# Altium PCB FEU-102-1_part2.PcbDoc
Units mm, origin at the board's own origin, x right, y up, seen from the top; angles counter-clockwise.
Board outline 20 x 20 mm, 2 copper layers (Top Layer, Bottom Layer), stack 1.021 mm thick; 28 components, 24 nets, 67 pads, 3 vias.
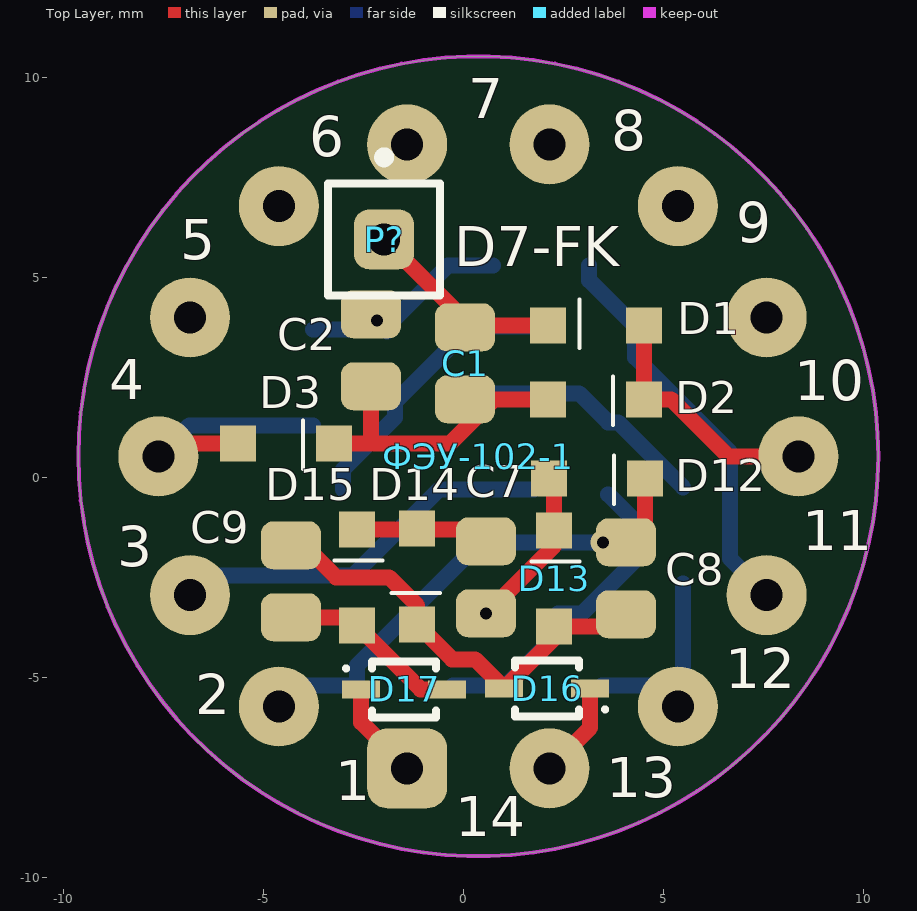
[diagram p0: Top Layer view]
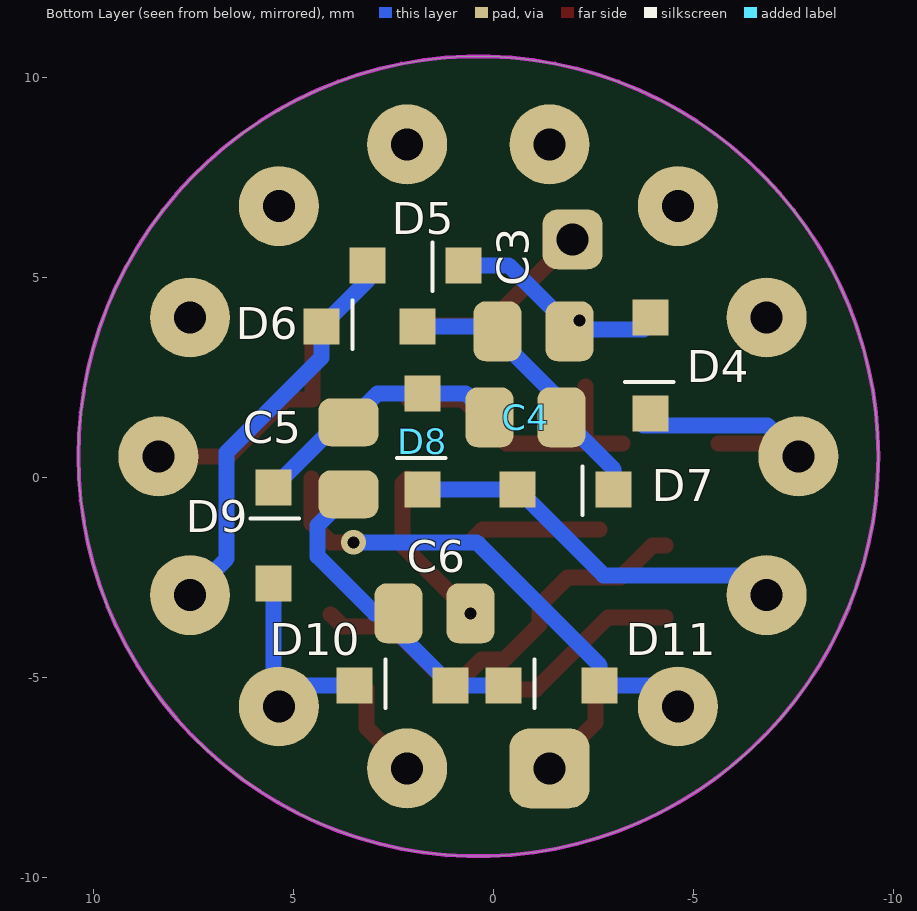
[diagram p1: Bottom Layer view, seen from below]

## Layer stack, top to bottom
Top Solder: solder mask 0.0102, Solder Resist, Dk 3.5
Top Layer: signal copper 0.0356
Dielectric1: dielectric 0.95, FR-4, Dk 4.8
Bottom Layer: signal copper 0.0356
Bottom Solder: solder mask 0.0102, Solder Resist, Dk 3.5

## Board outline
-9.62,0.526 ccw(c0.38,0.526) 0.38,-9.474 ccw(c0.38,0.526) 10.38,0.526 ccw(c0.38,0.526) 0.38,10.526 ccw(c0.38,0.526)

## Design rules (kind name [scope] priority, off if disabled: settings)
Clearance [All] p1: gap=0.25
ComponentClearance [All] p1: gap=0.1 collisioncheckmode=3 verticalgap=0.254 showdistances=TRUE
HoleSize [All] p1: absolutevalues=TRUE maxlimit=2.54 minlimit=0.3 maxpercent=80.000 minpercent=20.000
HoleToHoleClearance [All] p1: gap=0.152 allowstackedmicrovias=TRUE
MinimumAnnularRing [All] p1: minimumring=0.2
MinimumSolderMaskSliver [All] p1: minsoldermaskwidth=0.152
PlaneClearance [All] p1: clearance=2
PlaneConnect [All] p1: planeconnectstyle=Relief reliefexpansion=0.457 reliefentries=4 reliefconductorwidth=0.3 reliefairgap=0.457
PolygonConnect PolygonConnect_via [IsVia] p1: connectstyle=Direct reliefconductorwidth=0.254 reliefentries=4 polygonreliefangle="90 Angle" airgapwidth=0.254
PolygonConnect [All] p2: connectstyle=Relief reliefconductorwidth=0.254 reliefentries=4 polygonreliefangle="90 Angle" airgapwidth=0.254
RoutingVias [All] p1: holewidth=0.3 width=0.62 viastyle="Through Hole" minholewidth=0.3 minwidth=0.62 maxholewidth=6 maxwidth=4
SilkToSilkClearance [All] p1: silktosilkclearance=0.152
SilkToSolderMaskClearance SilkscreenOverComponentPads [IsPad] p1: minsilkscreentomaskgap=0.1 clearancetoexposedcopper=TRUE
SolderMaskExpansion [All] p1: expansion=0.1
Width [All] p1: maxlimit=2.254 minlimit=0.4 preferedwidth=0.4
22 further rules are at their usual default settings.

## Components (designator, comment, footprint, x,y, rotation, side; value= is the part's Value field where it differs from the comment)
C1 "47nF" 0805_CAP 0.05,2.85 r90 top
C2 "47nF" 0805_CAP -2.3,3.175 r270 top
C3 "47nF" 0805_CAP -1,3.65 r180 bottom
C4 "47nF" 0805_CAP -0.8,1.5 r180 bottom
C5 "47nF" 0805_CAP 3.625,0.475 r90 bottom
C6 "47nF" 0805_CAP 1.475,-3.4 r0 bottom
C7 "47nF" 0805_CAP 0.575,-2.5 r270 top
C8 "47nF" 0805_CAP 4.075,-2.525 r90 top
C9 "47nF" 0805_CAP -4.3,-2.6 r90 top
D1 "" DA2JF8100L 4.525,3.8 r180 top
D2 "" DA2JF8100L 2.125,1.95 r0 top
D3 "" DA2JF8100L -5.625,0.85 r0 top
D4 "" DA2JF8100L -3.925,4 r270 bottom
D5 "" DA2JF8100L 3.15,5.3 r180 bottom
D6 "" DA2JF8100L 1.9,3.775 r0 bottom
D7 "" DA2JF8100L -0.6,-0.3 r180 bottom
D8 "" DA2JF8100L 1.775,2.1 r270 bottom
D9 "" DA2JF8100L 5.5,-2.65 r90 bottom
D10 "" DA2JF8100L 1.075,-5.2 r0 bottom
D11 "" DA2JF8100L -2.65,-5.2 r0 bottom
D12 "" DA2JF8100L 2.15,-0.025 r0 top
D13 "" DA2JF8100L 2.275,-3.725 r90 top
D14 "" DA2JF8100L -1.15,-1.275 r270 top
D15 "" DA2JF8100L -2.65,-3.7 r90 top
D16 "D Zener" BZX384 2.1,-5.275 r180 top
D17 "D Zener" BZX384 -1.475,-5.3 r0 top
P? "Plug" PIN1 -1.975,5.95 r0 top
ФЭУ-102-1 "Header 7X2" ФЭУ-102 0.38,0.526 r0 top locked

## Footprints (in the part's own frame and the unit in brackets; to place one, negate y for a bottom-side part, rotate by r counter-clockwise, add the part's x,y. Pads: shape width x height; smd on the part's side, far side on the other; paste and mask are expansions set on the pad)
0805_CAP [mm]
  rrect50% 1.2x1.5 smd: 1(-0.9,0) 2(0.9,0)
  body extent -1.11,-0.72 1.1,0.72, height 0.94
BZX384 [mm] "SOD323"
  rect 0.95x0.45 smd: 1(1.075,0) 2(-1.075,0)
  silkscreen extent -1.5,-0.7 0.8,0.7, body extent -1.25,-0.67 1.25,0.67, height 1.1
DA2JF8100L [mm]
  rect 0.9x0.9 smd: 1(0,0) 2(2.4,0)
  silkscreen extent 1.62,-0.64 1.62,0.57, body extent 0.36,-0.65 2.06,0.6, height 0.7
PIN1 [mm] "Connector; Plug"
  rrect50% 1.5x1.5 hole 0.8: 1(0,0)
  silkscreen extent -1.4,-1.4 1.4,2.17
ФЭУ-102 [mm]
  rrect50% 2x2 hole 0.8: 1(-1.78,-7.799)
  round 2 hole 0.8: 2(-4.988,-6.255) 3(-7.208,-3.471) 4(-8,0) 5(-7.208,3.471) 6(-4.988,6.255) 7(-1.78,7.799) 8(1.78,7.799) 9(4.988,6.255) 10(7.208,3.471) 11(8,0) 12(7.208,-3.471) 13(4.988,-6.255) 14(1.78,-7.799)
  Keep-Out Layer circle w0.1: c0,0 r10

## Part data
C1 C2 C3 C4 C5 C6 C7 C8 C9: library part "Cap Semi", "Capacitor (Semiconductor SIM Model)"
D1 D2 D3 D4 D5 D6 D7 D8 D9 D10 D11 D12 D13 D14 D15: library part Diode, "Default Diode"
D16 D17: "Zener Diode"
ФЭУ-102-1: "Header, 7-Pin, Dual row"

## Via types
v1: diameter 0.62, hole 0.3, Top Layer to Bottom Layer, 3 vias

## Nets (pads, with @x,y where several pads share a name; then routed paths per layer and width w, separated by ;. In a path a pad name is that pad's centre, name@x,y a point inside that pad or via, vN(x,y) a via of type N, cw(c..) or ccw(c..) an arc to the next point about the centre after c; other vN are vias at no path point)
ANODE: ФЭУ-102-1.9
DINODE1: D16.2 ФЭУ-102-1.14 | length 2.4
  Top Layer w0.4: ФЭУ-102-1.14 3.175,-6.259 D16.2
DINODE2: C8.2 D11.1 D12.2 ФЭУ-102-1.2 | length 12.5
  Top Layer w0.4: v1(3.5,-1.625) C8.2 4.55,-1.15 D12.2
  Bottom Layer w0.4: ФЭУ-102-1.2 -4.079,-5.2 D11.1 -2.65,-4.7 0.425,-1.625 v1(3.5,-1.625)
DINODE3: D9.1 D10.2 ФЭУ-102-1.13 | length 5.2
  Bottom Layer w0.4: D10.2 4.839,-5.2 ФЭУ-102-1.13 5.5,-5.597 D9.1
DINODE4: D7.1 D8.2 ФЭУ-102-1.3 | length 9.7
  Bottom Layer w0.4: ФЭУ-102-1.3 -6.332,-2.45 -2.75,-2.45 D7.1 D8.2
DINODE5: D5.1 D6.2 ФЭУ-102-1.12 | length 10.1
  Bottom Layer w0.4: D5.1 3.15,4.925 D6.2 4.3,3 6.675,0.625 6.675,-2.033 ФЭУ-102-1.12
DINODE6: D3.1 D4.2 ФЭУ-102-1.4 | length 6.3
  Top Layer w0.4: ФЭУ-102-1.4 -7.295,0.85 D3.1
  Bottom Layer w0.4: ФЭУ-102-1.4 -6.845,1.3 D4.2@-3.75,1.3
DINODE7: D1.1 D2.2 ФЭУ-102-1.11 | length 6.3
  Top Layer w0.4: D1.1 D2.2 5.2,1.95 6.624,0.526 ФЭУ-102-1.11
DINODE8: ФЭУ-102-1.5
DINODE9: ФЭУ-102-1.10
DINODE10: ФЭУ-102-1.6
DINODE11: ФЭУ-102-1.7
DINODE12: ФЭУ-102-1.8
FOTOKAT: D17.2 ФЭУ-102-1.1 | length 2.5
  Top Layer w0.4: D17.2 -2.55,-6.124 ФЭУ-102-1.1
NetC1_1: C1.1 C2.2 D2.1 D3.2 | length 7.3
  Top Layer w0.4: D3.2 -2.375,0.85 ; C2.2 -2.3,0.925 -2.375,0.85 ; D2.1 0.775,1.95 -0.325,0.85 -2.375,0.85
NetC1_2: C1.2 D1.2 P?.1 | length 5.1
  Top Layer w0.4: P?.1 0.05,3.925 C1.2 0.1,3.8 D1.2
NetC2_1: C2.1 C3.2 D4.1 D5.2 | length 5.2
  Top Layer w0.4: C2.1 v1(-2.15,3.925)
  Bottom Layer w0.4: D4.1@-3.75,3.7 C3.2@-2.15,3.7 ; C3.2 -1.9,3.775 -0.375,5.3 D5.2
NetC3_1: C3.1 C4.2 D6.1 D7.2 | length 7.1
  Bottom Layer w0.4: D7.2 -3,0.2 C4.2 -1.7,1.889 0.05,3.639 0.05,3.65 0.175,3.775 D6.1
NetC4_1: C4.1 C5.2 D8.1 D9.2 | length 6.6
  Bottom Layer w0.4: C4.1 0.7,2.1 D8.1 2.9,2.1 C5.2 3.875,1.375 D9.2
NetC5_1: C5.1 C6.2 D10.1 D11.2 | length 8.1
  Bottom Layer w0.4: D11.2 D10.1 2.375,-3.9 C6.2 2.975,-3.4 4.4,-1.975 4.4,-1.2 C5.1
NetC6_1: C6.1 C7.2 D12.1 D13.2 | length 4.1
  Top Layer w0.4: C7.2@0.586,-3.4 2.275,-1.711 D13.2 2.275,-0.15 D12.1
  other v1: 0.575,-3.4
NetC7_1: C7.1 D14.1 D15.2 | length 3.3
  Top Layer w0.4: D15.2 0.275,-1.3 C7.1
NetC8_1: C8.1 C9.2 D13.1 D14.2 D16.1 | length 11.1
  Top Layer w0.4: C9.2 -3.975,-1.7 -3.175,-2.5 -1.85,-2.5 -1.15,-3.2 D14.2 -0.275,-4.55 0.3,-4.55 D16.1 2.275,-4.025 D13.1 3.775,-3.725 C8.1
NetC9_1: C9.1 D15.1 D17.1 | length 4.6
  Top Layer w0.4: C9.1 -2.861,-3.5 -1.061,-5.3 D17.1

## Silkscreen, mask and mechanical layers (free items; w line width, h text height)
Top Overlay:
  text "7" at 0.125,8.975 h1
  text "8" at 3.7,8.175 h1
  text "6" at -3.85,8.025 h1
  text "9" at 6.825,5.875 h1
  text "5" at -7.075,5.45 h1
  text "D7-FK" at -0.225,5.275 h1
  text "4" at -8.85,1.95 h1
  text "10" at 8.275,1.925 h1
  text "11" at 8.475,-1.825 h1
  text "3" at -8.65,-2.225 h1
  text "12" at 6.55,-5.275 h1
  text "2" at -6.7,-5.925 h1
  text "13" at 3.575,-8 h1
  text "1" at -3.2,-8.075 h1
  text "14" at -0.2,-8.975 h1